# Altium PCB PCB1.PcbDoc
Units mil, origin at the board's own origin, x right, y up, seen from the top; angles counter-clockwise.
Board outline 6000 x 4000 mil, 2 copper layers (Top Layer, Bottom Layer); 25 components, 9 nets, 120 pads, 6 vias.
Unrouted connection lines stored in the file: 25.
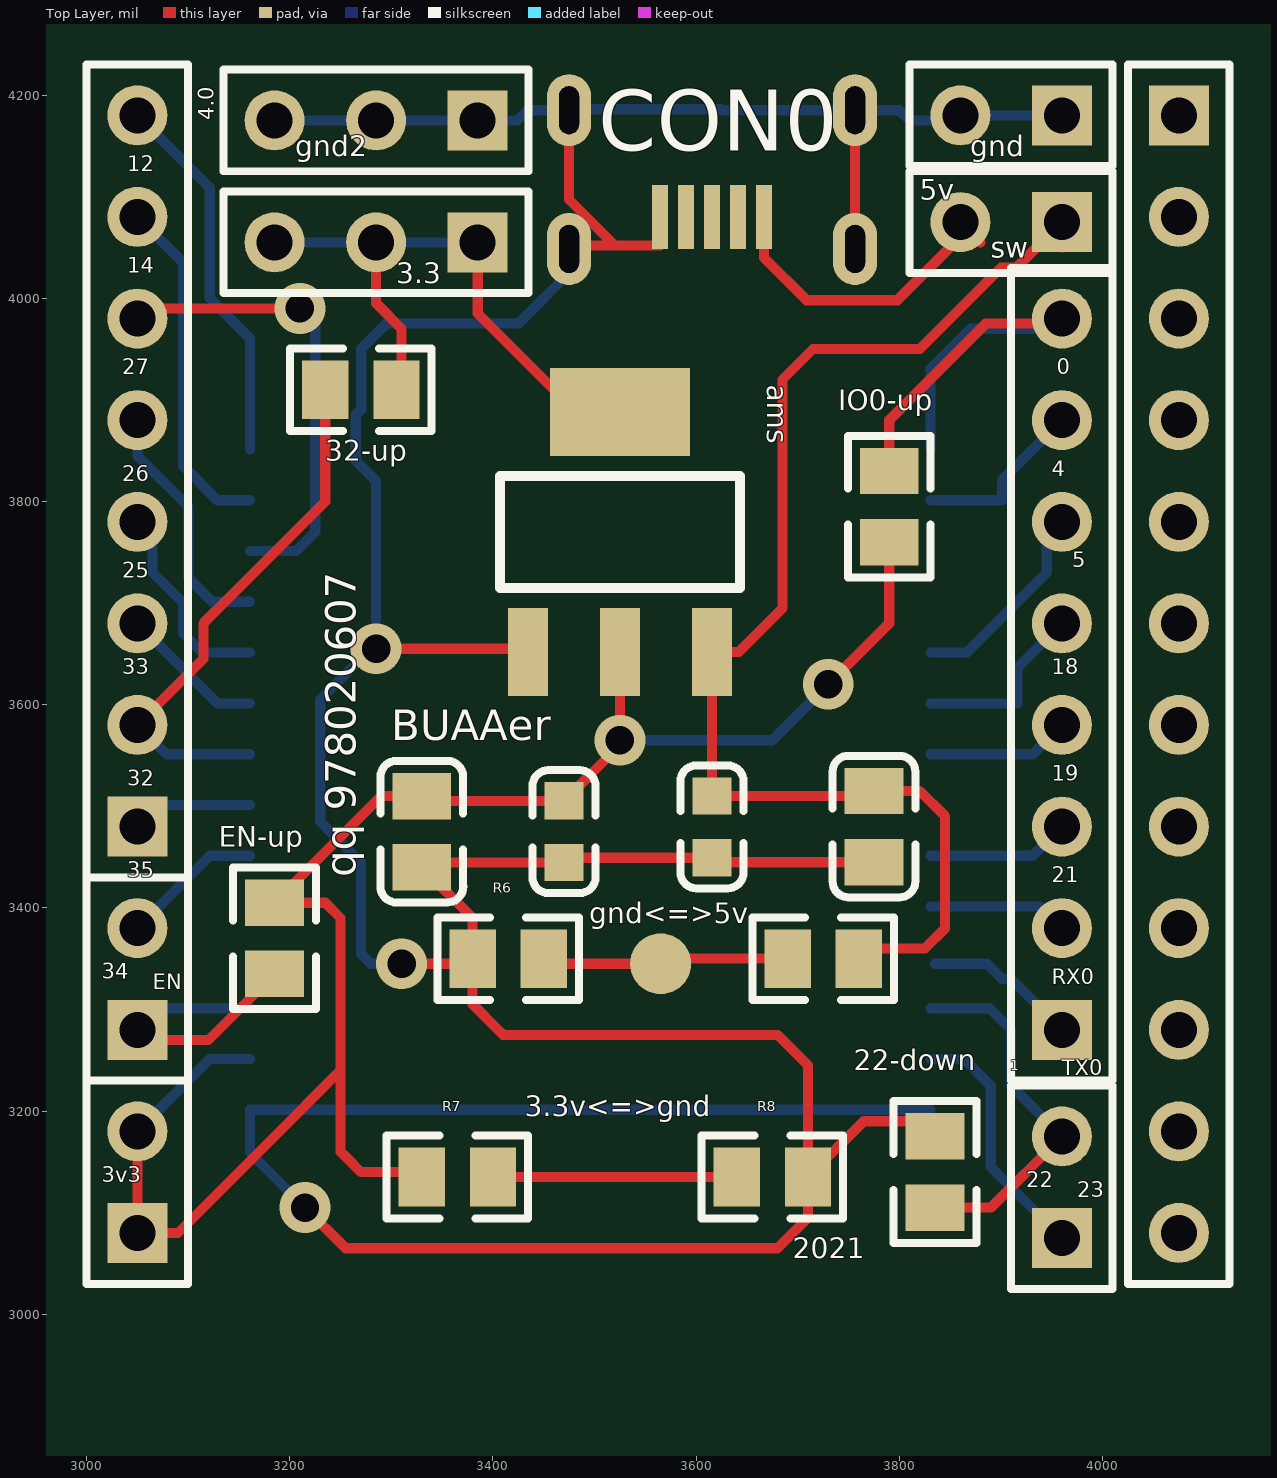
[diagram p0: Top Layer view]
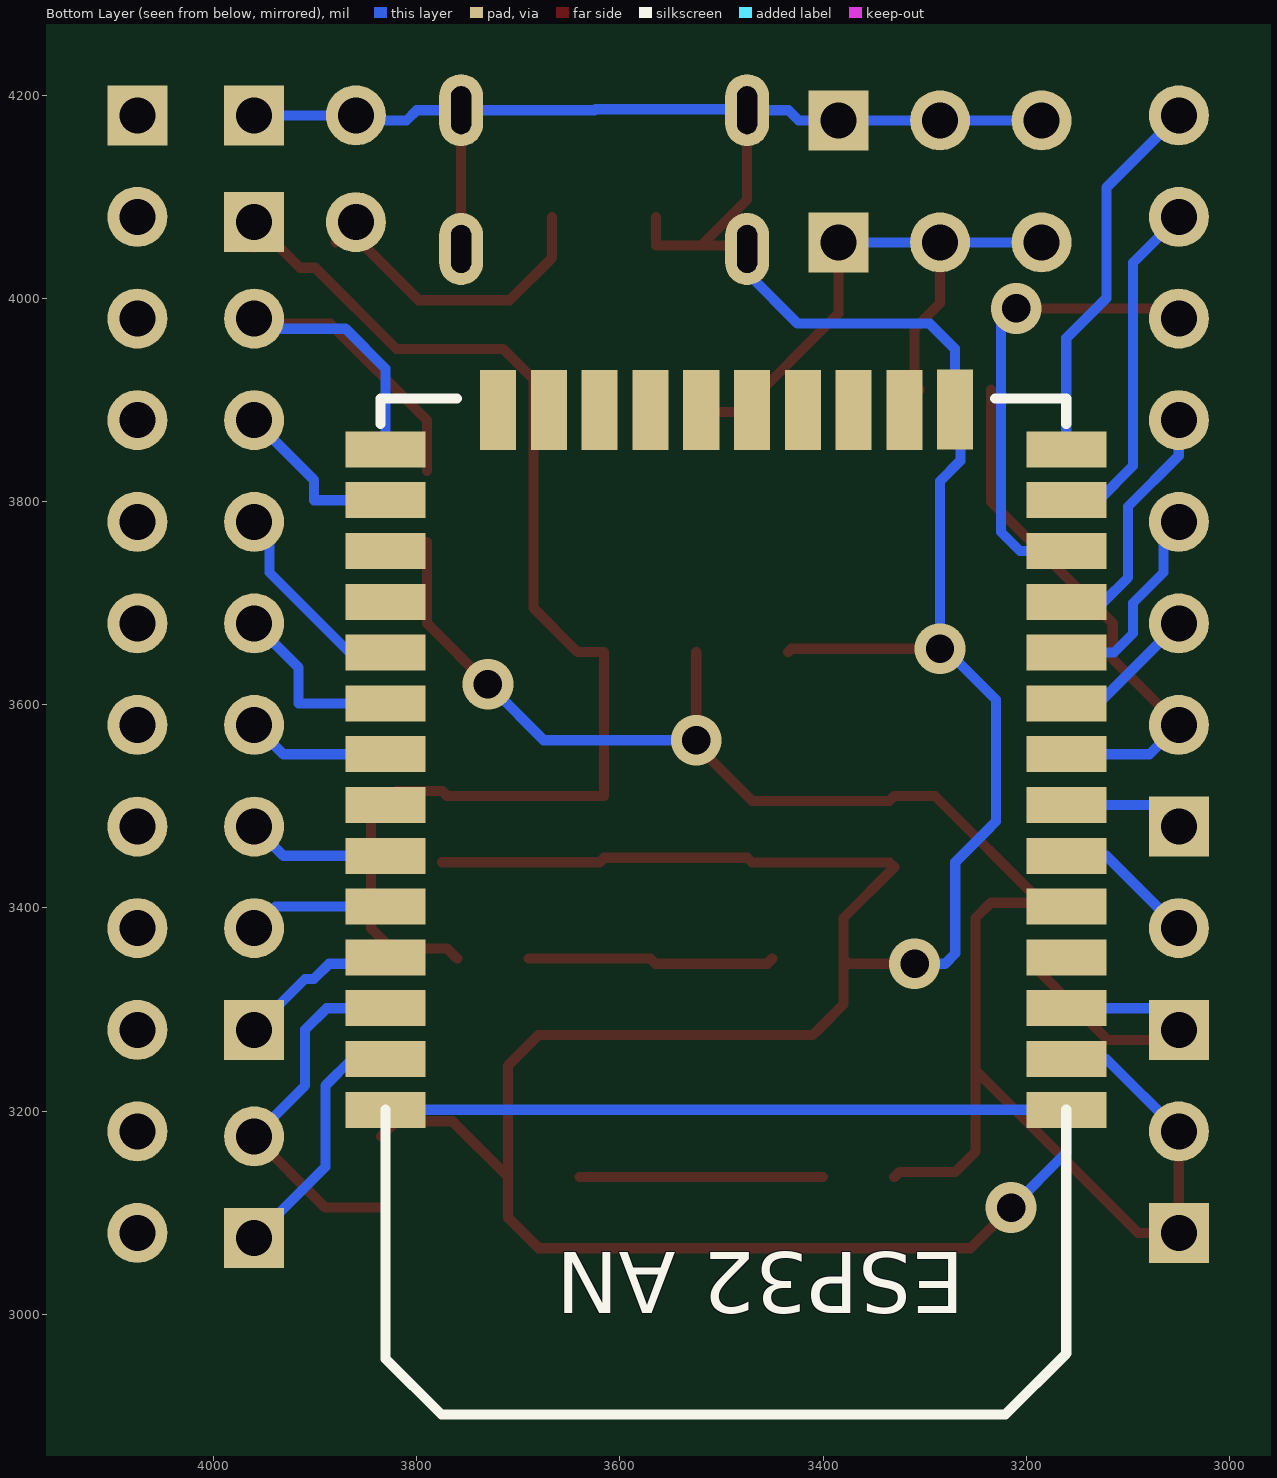
[diagram p1: Bottom Layer view, seen from below]

## Layer stack, top to bottom
Top Solder: solder mask 0.4, Solder Resist, Dk 3.5
Top Layer: signal copper 1.4
Dielectric 1: dielectric 12.6, FR-4, Dk 4.8
Bottom Layer: signal copper 1.4
Bottom Solder: solder mask 0.4, Solder Resist, Dk 3.5

## Board outline
1000,1000 7000,1000 7000,5000 1000,5000

## Design rules (kind name [scope] priority, off if disabled: settings)
Clearance [All] p1: gap=10 ignorepadtopadclearanceinfootprint=FALSE except(0: Arc-Hole Track-Hole SMDPad-Hole THPad-Hole Via-Hole Fill-Hole Poly-Hole Region-Hole Text-Hole)
PolygonConnect [All] p1: connectstyle=Relief reliefconductorwidth=10 reliefentries=4 polygonreliefangle="90 Angle" airgapwidth=10
RoutingVias [All] p1: holewidth=28 width=50 viastyle="Through Hole" minholewidth=28 minwidth=50 maxholewidth=28 maxwidth=50
SolderMaskExpansion [All] p1: expansion=4
Width [All] p1: maxlimit=10 minlimit=10 preferedwidth=10
30 further rules are at their usual default settings.

## Classes and differential pairs
component class Sheet1: 3.3 5v 32-up ams CON0 EN-up gnd gnd2

## Components (designator, comment, footprint, x,y, rotation, side; value= is the part's Value field where it differs from the comment)
1 "Header 2" HDR1X2 3960,3075 r90 top (schematic designator "deep sleep")
3.3 "Header 3" HDR1X3 3385,4055 r180 top
4.0 "Header 8" HDR1X8 3050,3480 r90 top (schematic designator P0)
5v "Header 2" HDR1X2 3960,4075 r180 top
22-down "10KΩ (1002) ±1%" LC-0805_R 3835,3140 r90 top (schematic designator R0)
32-up "10KΩ (1002) ±1%" LC-0805_R 3270,3910 r0 top (schematic designator R2)
ams "AMS1117-3.3" LC-SOT-223 3525,3770 r270 top
C1 "10uF (106) 10% 10V" LC-0603_C 3615.59,3479.69 r90 top
C2 "100nF(104) 10% 50V" LC-0805_C 3775,3480 r90 top
C3 "10uF (106) 10% 10V" LC-0603_C 3470,3475 r90 top
C4 "100nF(104) 10% 50V" LC-0805_C 3330,3475 r90 top
CON0 "USB_Connector" MicroUSB 3615.59,4048.5 r270 top
"deep sleep" "Header 2" HDR1X2 3050,3080 r90 top
"deep sleep" "Header 2" HDR1X2 3050,3280 r90 top
EN-up "10KΩ (1002) ±1%" LC-0805_R 3185,3370 r90 top (schematic designator R1)
gnd "Header 2" HDR1X2 3960,4180 r180 top
gnd2 "Header 3" HDR1X3 3385,4175 r180 top
gnd<=>5v "10KΩ (1002) ±1%" LC-0805_R 3725,3350 r0 top (schematic designator R4)
IO0-up "10KΩ (1002) ±1%" LC-0805_R 3790,3794.96 r270 top (schematic designator R3)
P1 "Header 8" HDR1X8 3960,3280 r90 top
R6 "10KΩ (1002) ±1%" LC-0805_R 3415,3350 r0 top (schematic designator R4)
R7 "10KΩ (1002) ±1%" LC-0805_R 3365,3135 r0 top (schematic designator R4)
R8 "10KΩ (1002) ±1%" LC-0805_R 3675,3135 r0 top (schematic designator R4)
? "Comment" PCBComponent_1 3160.71,3826.26 r0 bottom
? "Comment" HDR1X12 4075,4180 r270 top

## Footprints (in the part's own frame and the unit in brackets; to place one, negate y for a bottom-side part, rotate by r counter-clockwise, add the part's x,y. Pads: shape width x height; smd on the part's side, far side on the other; paste and mask are expansions set on the pad)
HDR1X2 [mm] "Connector; Header; 2 Position"
  rect 1.5x1.5 hole 0.9: 1(0,0)
  round 1.5 hole 0.9: 2(2.54,0)
  silkscreen extent -1.27,-1.27 3.81,1.27
HDR1X3 [mm] "Connector; Header; 3 Position"
  rect 1.5x1.5 hole 0.9: 1(0,0)
  round 1.5 hole 0.9: 2(2.54,0) 3(5.08,0)
  silkscreen extent -1.27,-1.27 6.35,1.27
HDR1X8 [mm] "Connector; Header; 8 Position"
  rect 1.5x1.5 hole 0.9: 1(0,0)
  round 1.5 hole 0.9: 2(2.54,0) 3(5.08,0) 4(7.62,0) 5(10.16,0) 6(12.7,0) 7(15.24,0) 8(17.78,0)
  silkscreen extent -1.27,-1.27 19.05,1.27
HDR1X12 [mm] "Connector; Header; 12 Position"
  rect 1.5x1.5 hole 0.9: 1(0,0)
  round 1.5 hole 0.9: 2(2.54,0) 3(5.08,0) 4(7.62,0) 5(10.16,0) 6(12.7,0) 7(15.24,0) 8(17.78,0) 9(20.32,0) 10(22.86,0) 11(25.4,0) 12(27.94,0)
  silkscreen extent -1.27,-1.27 29.21,1.27
LC-0603_C [mm]
  rect 0.93x0.98 smd: 1(-0.77,0) 2(0.77,0)
  silkscreen extent -1.54,-0.79 1.54,0.79, body extent -0.8,-0.4 0.8,0.4, height 0.3
LC-0805_C [mm]
  rect 1.16x1.47 smd: 1(-0.89,0) 2(0.89,0)
  silkscreen extent -1.77,-1.04 1.77,1.04, body extent -1,-0.62 1,0.63, height 0.77
LC-0805_R [mm]
  rect 1.16x1.47 smd: 1(-0.89,0) 2(0.89,0)
  silkscreen extent -1.77,-1.03 1.77,1.03, body extent -1,-0.62 1,0.63, height 0.49
LC-SOT-223 [mm]
  rect 2.2x1 smd: 1(3,-2.3) 2(3,0) 3(3,2.3)
  rect 2.2x3.5 smd: 2(-3,0)
  silkscreen extent -1.4,-3 1.4,3, body extent -3.49,-3.24 3.49,3.24, height 1.64
MicroUSB [mm]
  rect 1.6x0.4 smd mask+0.05: 1(-0.8,1.3) 2(-0.8,0.65) 3(-0.8,0) 4(-0.8,-0.65) 5(-0.8,-1.3)
  oval 1.8x1.1 hole 0.5 slot 1.2 at 0 deg: GND(-3.47,3.575) GND(-3.47,-3.575) GND(0,3.575) GND(0,-3.575)
PCBComponent_1 [mm]
  rect 2x0.9 smd: 1(0,15.875) 2(0,14.605) 3(0,13.335) 4(0,12.065) 5(0,10.795) 6(0,9.525) 7(0,8.255) 8(0,6.985) 9(0,5.715) 10(0,4.445) 11(0,3.175) 12(0,1.905) 13(0,0.635) 14(0,-0.635) 25(17.018,-0.635) 26(17.018,0.635) 27(17.018,1.905) 28(17.018,3.175) 29(17.018,4.445) 30(17.018,5.715) 31(17.018,6.985) 32(17.018,8.255) 33(17.018,9.525) 34(17.018,10.795) 35(17.018,12.065) 36(17.018,13.335) 37(17.018,14.605) 38(17.018,15.875)
  rect 0.9x2 smd: 15(2.785,-1.635) 16(4.046,-1.619) 17(5.316,-1.619) 18(6.586,-1.619) 19(7.856,-1.619) 20(9.126,-1.619) 21(10.396,-1.619) 22(11.666,-1.619) 23(12.936,-1.619) 24(14.206,-1.619)
  silkscreen extent 0,-1.91 17.14,23.49

## Part data
1 5v "deep sleep" "deep sleep" gnd: "Header, 2-Pin", LatestRevisionDate=17-Jul-2002, LatestRevisionNote="Re-released for DXP Platform.", Publisher="Altium Limited"
3.3 gnd2: "Header, 3-Pin", LatestRevisionDate=17-Jul-2002, LatestRevisionNote="Re-released for DXP Platform.", Publisher="Altium Limited"
4.0 P1: "Header, 8-Pin", LatestRevisionDate=17-Jul-2002, LatestRevisionNote="Re-released for DXP Platform.", Publisher="Altium Limited"
22-down 32-up EN-up gnd<=>5v IO0-up R6 R7 R8: library part "0805 10KΩ (1002) 1%", "贴片电阻", Package=0805, SuppliersPartNumber=C17414, ComponentLink1Description=供?, ComponentLink1URL=http://www.szlcsc.com/product/details_18102.html, Supplier=LC
ams: library part "SOT-223 AMS1117-3.3", "低压差线性稳压(LDO)", Package=SOT-223, SuppliersPartNumber=C6186, ComponentLink1Description=供?, ComponentLink1URL=http://www.szlcsc.com/product/details_6652.html, Supplier=LC
C1 C3: library part "0603 10uF (106) 10% 10V", "贴片电容", Package=0603, SuppliersPartNumber=C19702, ComponentLink1Description=供?, ComponentLink1URL=http://www.szlcsc.com/product/details_20411.html, Supplier=LC
C2 C4: library part "0805 100nF(104) 10% 50V", "贴片电容", Package=0805, SuppliersPartNumber=C49678, ComponentLink1Description=供?, ComponentLink1URL=http://www.szlcsc.com/product/details_50686.html, Supplier=LC

## Free pads (board coordinates)
  round 60 smd: 1(3565,3345)

## Via types
v1: diameter 50, hole 28, Top Layer to Bottom Layer, tented both sides, 6 vias

## Nets (pads, with @x,y where several pads share a name; then routed paths per layer and width w, separated by ;. In a path a pad name is that pad's centre, name@x,y a point inside that pad or via, vN(x,y) a via of type N, cw(c..) or ccw(c..) an arc to the next point about the centre after c; other vN are vias at no path point)
Net3.3_1: 3.3.1 3.3.2 3.3.3 4.0.8 22-down.2 32-up.2 ams.2 C3.2 C4.2 EN-up.2 | length 200
  Bottom Layer w10: 3.3.3 3.3.2 3.3.1
Net5v_1: 5v.1 5v.2 ams.3 C1.2 C2.2 CON0.1 | length 316.3
  Top Layer w10: CON0.1 3666.77,4040 3708.77,3998 3798,3998 3860,4060 5v.2 ; 5v.1@3960,4050 5v.1
Netams_1: ams.1 C1.1 C2.1 C3.1 C4.1 CON0.5 CON0.GND gnd2.1 gnd2.2 gnd2.3 gnd.1 gnd.2 IO0-up.2 P1.8 | length 1199.3
  Top Layer w10: CON0.GND@3474.84,4048.5 3474.84,4052 3520,4052 ; CON0.GND@3474.84,4185.12 3474.84,4097.16 3520,4052 ; CON0.5 3564.41,4052 3520,4052 ; CON0.GND@3756.34,4048.5 CON0.GND@3756.34,4185.12 ; gnd.2@3860,4170 gnd.2
  Bottom Layer w10: gnd2.3 gnd2.2 gnd2.1 3424,4175 3434.12,4185.12 3474.84,4185.12 3474.84,4186 3624,4186 3625,4185 3756.34,4185 3756.34,4185.12 3800,4185.12 3810.12,4175 gnd.2@3855,4175 ; gnd.2 gnd.1
"Netdeep sleep_1": 4.0.1 "deep sleep.1"@3050,3280
"Netdeep sleep_2": 4.0.4 "deep sleep.2"@3050,3380
NetP0_3: 4.0.3 22-down.1
NetP1_5: 32-up.1 P1.5
NetP1_6: EN-up.1 P1.6
NetP1_7: IO0-up.1 P1.7
pads on no net: 1.1 1.2 4.0.2 4.0.5 4.0.6 4.0.7 "deep sleep.1"@3050,3080 "deep sleep.2"@3050,3180 ?.1 ?.2 ?.3 ?.4 ?.5 ?.6 ?.7 ?.8 ?.9 ?.10 ?.11 ?.12 ?.13 ?.14 ?.15 ?.16 ?.17 ?.18 ?.19 ?.20 ?.21 ?.22 ?.23 ?.24 ?.25 ?.26 ?.27 ?.28 ?.29 ?.30 ?.31 ?.32 ?.33 ?.34 ?.35 ?.36 ?.37 ?.38 CON0.2 CON0.3 CON0.4 gnd<=>5v.1 gnd<=>5v.2 P1.1 P1.2 P1.3 P1.4 R6.1 R6.2 R7.1 R7.2 R8.1 R8.2
copper on no net: | length 12979.5
  Top Layer w10: 3050,3280 3060,3270 3120,3270 3184.96,3334.96 ; 3050,3580 3115,3645 3115,3680 3140,3705 3234.96,3799.96 3234.96,3910 ; 3050,3980 3060,3990 v1(3210,3990) ; 3060,3170 3050,3180 3050,3080 ; 3065,3065 3050,3080 ; v1(3215,3104.96) 3254.96,3065 3680,3065 3710.04,3095.04 3710.04,3135 ; 3250,3260 3250,3240 3180,3170 3090,3080 3050,3080 ; v1(3285,3655) 3345,3655 3390,3655 3431.34,3655 3434.45,3651.89 ; 3285,4055 3285,3995.04 3310.04,3970 3310.04,3915 3305.04,3910 ; v1(3310.04,3345) 3374.96,3345 3379.96,3350 ; 3329.96,3135 3324.96,3140 3270,3140 3255,3155 3250,3160 3250,3390 3234.96,3405.04 3185,3405.04 3290,3510.04 3330,3510.04 3334.72,3505.32 3470,3505.32 3525,3560.32 3525,3651.89 ; 3385,4055 3385,3985 3481.89,3888.11 3525,3888.11 ; 3400.04,3135 3639.96,3135 ; 3404.96,3280 3379.96,3305 3379.96,3350 ; 3405,3280 3410,3275 3680,3275 3710.04,3244.96 3710.04,3135.04 3765,3190 3820.04,3190 3835,3175.04 ; 3450.04,3350 3455.04,3345 3565,3345 3570,3350 3689.96,3350 ; 3525,3595 3525,3635 ; v1(3730,3620) 3790,3680 3790,3759.92 ; 3760.04,3350 3770.04,3360 3825,3360 3845,3380 3845,3490 3819.96,3515.04 3775,3515.04 3769.96,3510 3615.59,3510 3615.55,3510.04 3615.55,3651.89 3641.89,3651.89 3685,3695 3685,3885 3685,3920 3715,3950 3820,3950 3900,4030 3915,4030 3960,4075 ; 3775,3444.96 3620,3444.96 3615.59,3449.37 3474.68,3449.37 3470,3444.69 3334.73,3444.69 3330,3439.96 3379.96,3390 3379.96,3350 ; 3790,3830 3790,3880 3885,3975 3955,3975 3960,3980 ; 3835,3104.96 3889.96,3104.96 3960,3175 ; 3860,4060 3860,4075 3880,4055 ; 4065,3090 4075,3080
  Bottom Layer w10: 3050,3180 3121.26,3251.26 3160.71,3251.26 ; 3050,3380 3121.26,3451.26 3160.71,3451.26 ; 3050,3480 3071.26,3501.26 3160.71,3501.26 ; 3050,3580 3078.74,3551.26 3160.71,3551.26 ; 3050,3680 3128.74,3601.26 3160.71,3601.26 ; 3050,3780 3065,3765 3065,3730 3095,3700 3095,3670 3113.74,3651.26 3160.71,3651.26 ; 3050,3880 3050,3845 3100,3795 3100,3725 3123.74,3701.26 3160.71,3701.26 ; 3050,4080 3095,4035 3095,3835 3128.74,3801.26 3160.71,3801.26 ; 3050,4180 3121.26,4108.74 3121.26,4000 3160.71,3960.55 3160.71,3851.26 ; 3160.71,3190.71 3160.71,3201.26 ; 3160.71,3301.26 3071.26,3301.26 ; 3160.71,3751.26 3206.26,3751.26 3225,3770 3225,3975 3220,3980 v1(3210,3990) ; v1(3215,3104.96) 3160.71,3159.25 3160.71,3201.26 ; v1(3285,3655) 3280,3655 3250,3625 3230,3605 3230,3590 3230,3485 3240,3475 3270,3445 3270,3444.69 3270,3355 3280,3345 v1(3310.04,3345) ; v1@3285,3660 3285,3820 3265,3840 3265,3885.28 ; 3474.84,4048.5 3474.84,4024.84 3425,3975 3295,3975 3270.35,3950.35 3270.35,3890.63 ; v1(3525,3565) 3555,3565 3675,3565 3725,3615 v1(3730,3620) ; 3830.71,3201.26 3160.71,3201.26 ; 3830.71,3251.26 3863.74,3251.26 3890,3225 3890,3145 3960,3075 ; 3830.71,3301.26 3888.74,3301.26 3910,3280 3910,3225 3960,3175 ; 3830.71,3401.26 3895,3401.26 3938.74,3401.26 3960,3380 ; 3830.71,3451.26 3923.74,3451.26 3931.26,3451.26 3960,3480 ; 3830.71,3551.26 3923.74,3551.26 3931.26,3551.26 3960,3580 ; 3830.71,3601.26 3916.26,3601.26 3916.26,3636.26 3960,3680 ; 3830.71,3651.26 3866.26,3651.26 3945,3730 3945,3765 ; 3830.71,3801.26 3901.26,3801.26 3901.26,3821.26 3960,3880 ; 3830.71,3851.26 3830.71,3930.71 3870,3970 3890,3970 3950,3970 3960,3980 ; 3835,3345 3886.26,3345 3901.26,3330 3910,3330 3960,3280 ; 3071.26,3301.26 3050,3280 3071.26,3301.26 ; 3265,3885.28 3270.35,3890.63 ; 3265,3885.28 3270.35,3890.63 ; 3945,3765 3960,3780 3945,3765

## Silkscreen, mask and mechanical layers (free items; w line width, h text height)
Top Overlay:
  text "12" at 3040,4125 h15
  text "sw" at 3890,4040 h20
  text "14" at 3040,4025 h15
  text "27" at 3035,3925 h15
  text "0" at 3955,3925 h15
  text "4" at 3950,3825 h15
  text "26" at 3035,3820 h15
  text "5" at 3970,3735 h15
  text "25" at 3035,3725 h15
  text "33" at 3035,3630 h15
  text "18" at 3950,3630 h15
  text "BUAAer" at 3300,3565 h30
  text "19" at 3950,3525 h15
  text "32" at 3040,3520 h15
  text "35" at 3040,3430 h15
  text "qq 978020607" at 3265,3430 h30 r90
  text "21" at 3950,3425 h15
  text "34" at 3015,3330 h15
  text "RX0" at 3950,3325 h15
  text "EN" at 3065,3320 h15
  text "TX0" at 3960,3235 h15
  text "3.3v<=>gnd" at 3431.34,3195 h20
  text "3v3" at 3015,3130 h15
  text "22" at 3925,3125 h15
  text "23" at 3975,3115 h15
  text "2021" at 3695,3055 h20
Mechanical 1:
  lines w10: 2985,3060 2985,4225 2995,4235 4015,4235 4120,4235 4125,4230 4125,3040 4115,3030 4000,3030 3015,3030 2985,3060

## Text inside footprints (layer, text, board x,y; h text height)
?: Bottom Overlay "ESP32 AN" at 3260.71,3061.26 h60 r180